# Altium PCB ExchangeDisplay3.PcbDoc (part 3 of 3)
Units mil, origin at the board's own origin, x right, y up, seen from the top; angles counter-clockwise.
Board outline 13550 x 7110 mil, 2 copper layers (Top Layer, Bottom Layer); 256 components, 104 nets, 660 pads, 110 vias.
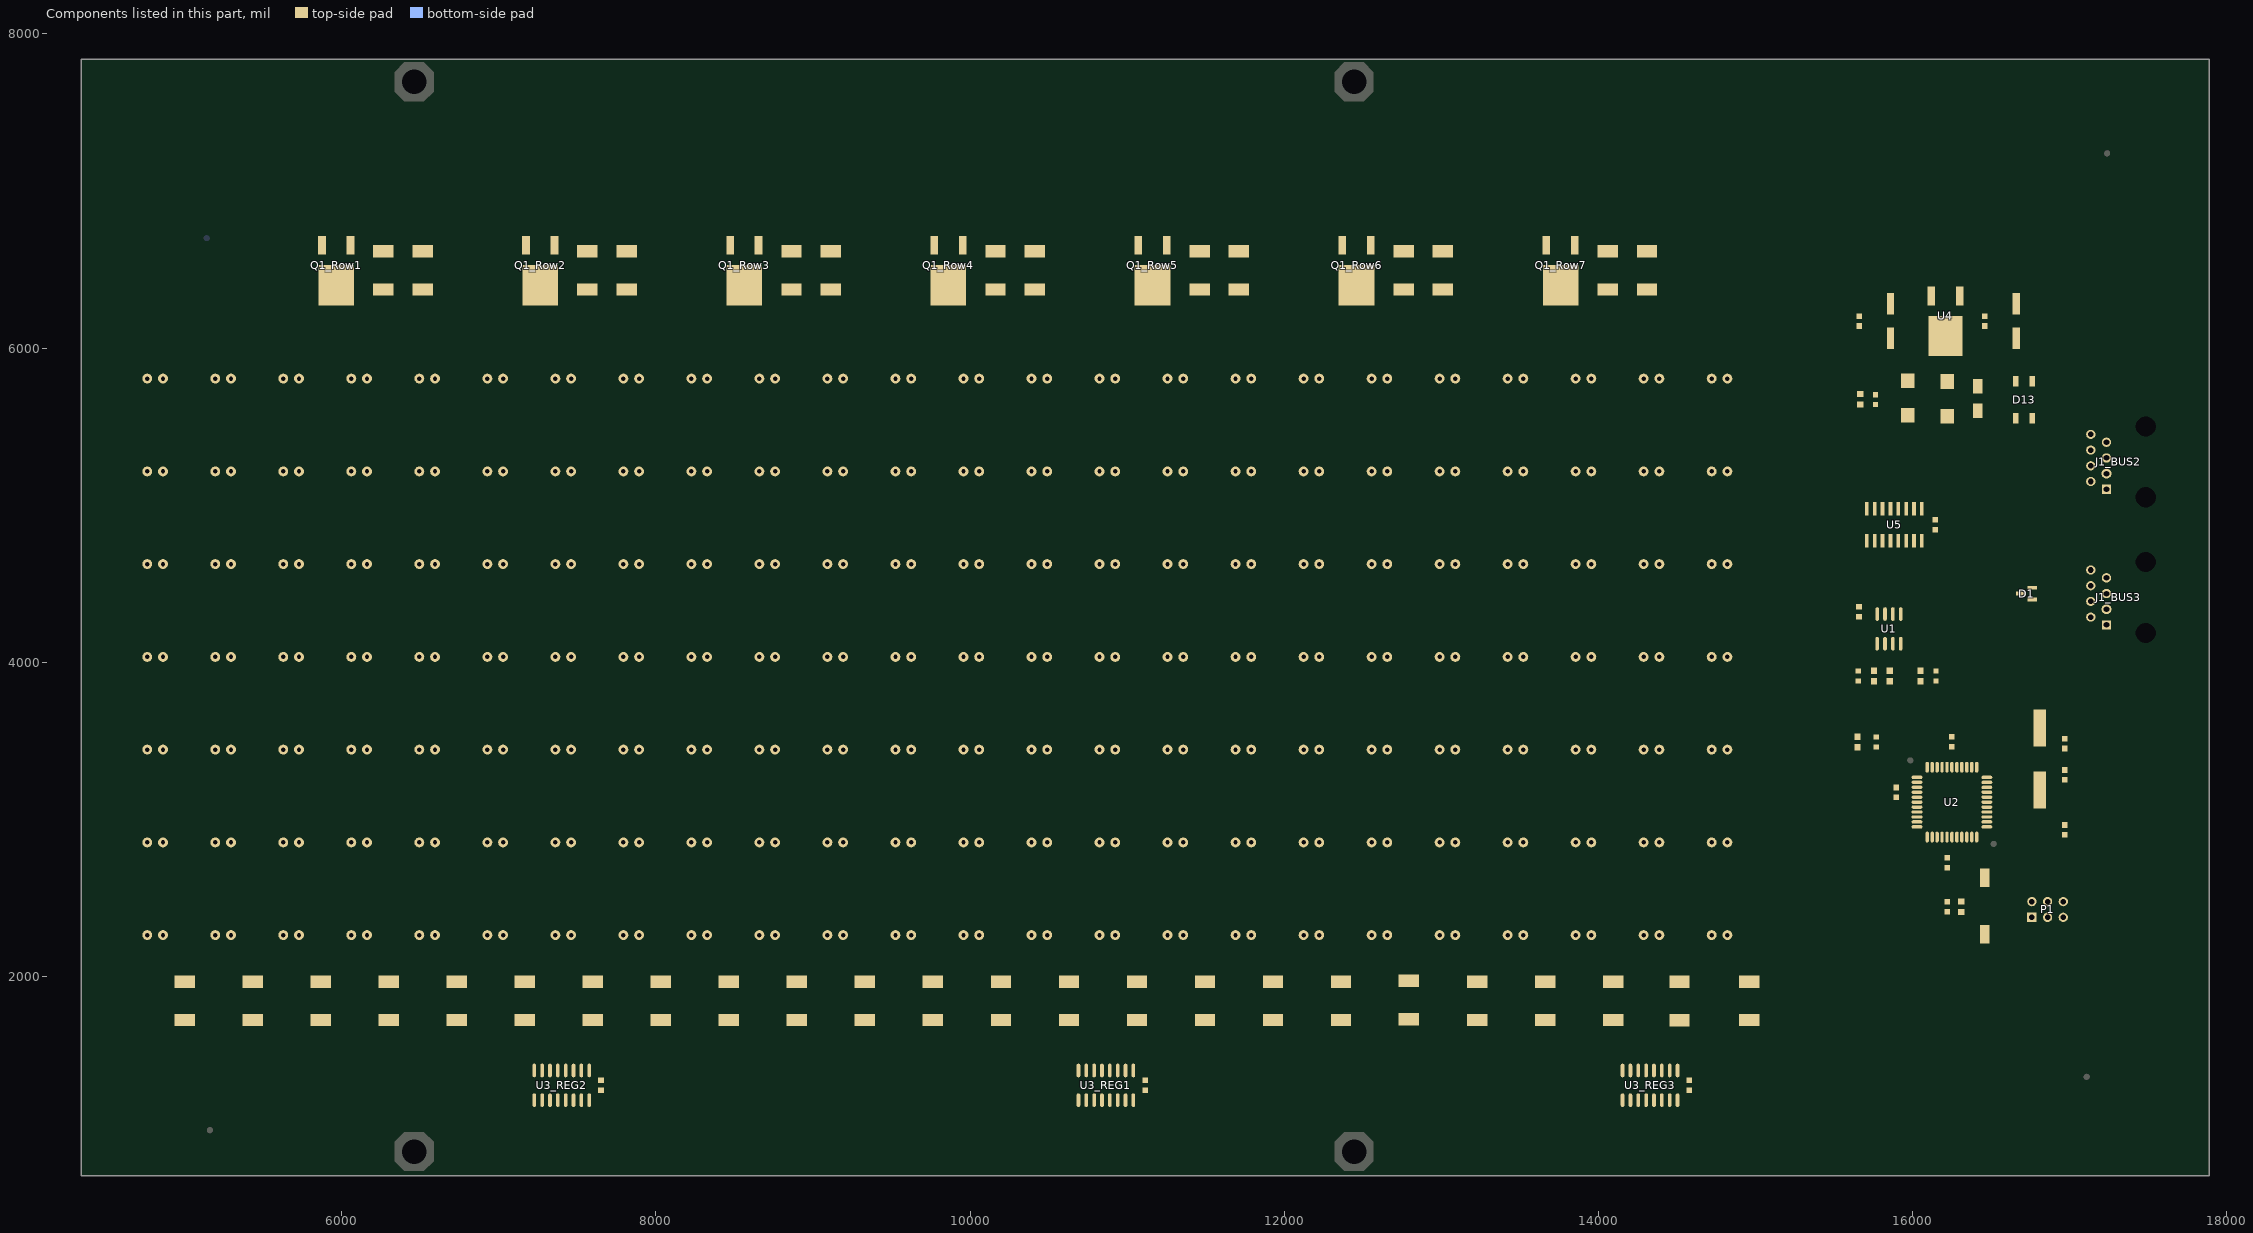
[diagram p3: the components of this part, seen from the top]

## Polygon pours and split planes (outlines as drawn) (continued)
RES22 on Top Layer "Top Layer-No Net" (solid, pour order 1000): 10985.75,5214.27 10985.75,5216.27 11087.75,5318.27 11087.75,5110.27
RES22 on Top Layer "Top Layer-No Net" (solid, pour order 1000): 10985.75,2852.06 10985.75,2854.06 11087.75,2956.06 11087.75,2748.06
RES23 on Top Layer "Top Layer-No Net" (solid, pour order 1000): 10552.68,2261.51 10552.68,2263.51 10654.68,2365.51 10654.68,2157.51
RES23 on Top Layer "Top Layer-No Net" (solid, pour order 1000): 10552.68,3442.61 10552.68,3444.61 10654.68,3546.61 10654.68,3338.61
RES23 on Top Layer "Top Layer-No Net" (solid, pour order 1000): 10552.68,4033.16 10552.68,4035.16 10654.68,4137.16 10654.68,3929.16
RES23 on Top Layer "Top Layer-No Net" (solid, pour order 1000): 10552.68,4623.72 10552.68,4625.72 10654.68,4727.72 10654.68,4519.72
RES23 on Top Layer "Top Layer-No Net" (solid, pour order 1000): 10552.68,5214.27 10552.68,5216.27 10654.68,5318.27 10654.68,5110.27
RES23 on Top Layer "Top Layer-No Net" (solid, pour order 1000): 10552.68,2852.06 10552.68,2854.06 10654.68,2956.06 10654.68,2748.06
RES24 on Top Layer "Top Layer-No Net" (solid, pour order 1000): 10119.61,2261.51 10119.61,2263.51 10221.61,2365.51 10221.61,2157.51
RES24 on Top Layer "Top Layer-No Net" (solid, pour order 1000): 10119.61,3442.61 10119.61,3444.61 10221.61,3546.61 10221.61,3338.61
RES24 on Top Layer "Top Layer-No Net" (solid, pour order 1000): 10119.61,4033.16 10119.61,4035.16 10221.61,4137.16 10221.61,3929.16
RES24 on Top Layer "Top Layer-No Net" (solid, pour order 1000): 10119.61,4623.72 10119.61,4625.72 10221.61,4727.72 10221.61,4519.72
RES24 on Top Layer "Top Layer-No Net" (solid, pour order 1000): 10119.61,5214.27 10119.61,5216.27 10221.61,5318.27 10221.61,5110.27
RES24 on Top Layer "Top Layer-No Net" (solid, pour order 1000): 10119.61,2852.06 10119.61,2854.06 10221.61,2956.06 10221.61,2748.06
RES25 on Top Layer "Top Layer-No Net" (solid, pour order 1000): 9686.54,2261.51 9686.54,2263.51 9788.54,2365.51 9788.54,2157.51
RES25 on Top Layer "Top Layer-No Net" (solid, pour order 1000): 9686.54,3442.61 9686.54,3444.61 9788.54,3546.61 9788.54,3338.61
RES25 on Top Layer "Top Layer-No Net" (solid, pour order 1000): 9686.54,4033.16 9686.54,4035.16 9788.54,4137.16 9788.54,3929.16
RES25 on Top Layer "Top Layer-No Net" (solid, pour order 1000): 9686.54,4623.72 9686.54,4625.72 9788.54,4727.72 9788.54,4519.72
RES25 on Top Layer "Top Layer-No Net" (solid, pour order 1000): 9686.54,5214.27 9686.54,5216.27 9788.54,5318.27 9788.54,5110.27
RES25 on Top Layer "Top Layer-No Net" (solid, pour order 1000): 9686.54,2852.06 9686.54,2854.06 9788.54,2956.06 9788.54,2748.06
RES26 on Top Layer "Top Layer-No Net" (solid, pour order 1000): 9253.47,2261.51 9253.47,2263.51 9355.47,2365.51 9355.47,2157.51
RES26 on Top Layer "Top Layer-No Net" (solid, pour order 1000): 9253.47,3442.61 9253.47,3444.61 9355.47,3546.61 9355.47,3338.61
RES26 on Top Layer "Top Layer-No Net" (solid, pour order 1000): 9253.47,4033.16 9253.47,4035.16 9355.47,4137.16 9355.47,3929.16
RES26 on Top Layer "Top Layer-No Net" (solid, pour order 1000): 9253.47,4623.72 9253.47,4625.72 9355.47,4727.72 9355.47,4519.72
RES26 on Top Layer "Top Layer-No Net" (solid, pour order 1000): 9253.47,5214.27 9253.47,5216.27 9355.47,5318.27 9355.47,5110.27
RES26 on Top Layer "Top Layer-No Net" (solid, pour order 1000): 9253.47,2852.06 9253.47,2854.06 9355.47,2956.06 9355.47,2748.06
RES27 on Top Layer "Top Layer-No Net" (solid, pour order 1000): 8820.4,2261.51 8820.4,2263.51 8922.4,2365.51 8922.4,2157.51
RES27 on Top Layer "Top Layer-No Net" (solid, pour order 1000): 8820.4,3442.61 8820.4,3444.61 8922.4,3546.61 8922.4,3338.61
RES27 on Top Layer "Top Layer-No Net" (solid, pour order 1000): 8820.4,4033.16 8820.4,4035.16 8922.4,4137.16 8922.4,3929.16
RES27 on Top Layer "Top Layer-No Net" (solid, pour order 1000): 8820.4,4623.72 8820.4,4625.72 8922.4,4727.72 8922.4,4519.72
RES27 on Top Layer "Top Layer-No Net" (solid, pour order 1000): 8820.4,5214.27 8820.4,5216.27 8922.4,5318.27 8922.4,5110.27
RES27 on Top Layer "Top Layer-No Net" (solid, pour order 1000): 8820.4,2852.06 8820.4,2854.06 8922.4,2956.06 8922.4,2748.06
RES28 on Top Layer "Top Layer-No Net" (solid, pour order 1000): 8387.33,2261.51 8387.33,2263.51 8489.33,2365.51 8489.33,2157.51
RES28 on Top Layer "Top Layer-No Net" (solid, pour order 1000): 8387.33,3442.61 8387.33,3444.61 8489.33,3546.61 8489.33,3338.61
RES28 on Top Layer "Top Layer-No Net" (solid, pour order 1000): 8387.33,4033.16 8387.33,4035.16 8489.33,4137.16 8489.33,3929.16
RES28 on Top Layer "Top Layer-No Net" (solid, pour order 1000): 8387.33,4623.72 8387.33,4625.72 8489.33,4727.72 8489.33,4519.72
RES28 on Top Layer "Top Layer-No Net" (solid, pour order 1000): 8387.33,5214.27 8387.33,5216.27 8489.33,5318.27 8489.33,5110.27
RES28 on Top Layer "Top Layer-No Net" (solid, pour order 1000): 8387.33,2852.06 8387.33,2854.06 8489.33,2956.06 8489.33,2748.06
RES11 on Top Layer "Top Layer-No Net" (solid, pour order 1000): 7954.26,2261.51 7954.26,2263.51 8056.26,2365.51 8056.26,2157.51
RES11 on Top Layer "Top Layer-No Net" (solid, pour order 1000): 7954.26,3442.61 7954.26,3444.61 8056.26,3546.61 8056.26,3338.61
RES11 on Top Layer "Top Layer-No Net" (solid, pour order 1000): 7954.26,4033.16 7954.26,4035.16 8056.26,4137.16 8056.26,3929.16
RES11 on Top Layer "Top Layer-No Net" (solid, pour order 1000): 7954.26,4623.72 7954.26,4625.72 8056.26,4727.72 8056.26,4519.72
RES11 on Top Layer "Top Layer-No Net" (solid, pour order 1000): 7954.26,5214.27 7954.26,5216.27 8056.26,5318.27 8056.26,5110.27
RES11 on Top Layer "Top Layer-No Net" (solid, pour order 1000): 7954.26,2852.06 7954.26,2854.06 8056.26,2956.06 8056.26,2748.06
RES12 on Top Layer "Top Layer-No Net" (solid, pour order 1000): 7521.18,2261.51 7521.18,2263.51 7623.18,2365.51 7623.18,2157.51
RES12 on Top Layer "Top Layer-No Net" (solid, pour order 1000): 7521.18,3442.61 7521.18,3444.61 7623.18,3546.61 7623.18,3338.61
RES12 on Top Layer "Top Layer-No Net" (solid, pour order 1000): 7521.18,4033.16 7521.18,4035.16 7623.18,4137.16 7623.18,3929.16
RES12 on Top Layer "Top Layer-No Net" (solid, pour order 1000): 7521.18,4623.72 7521.18,4625.72 7623.18,4727.72 7623.18,4519.72
RES12 on Top Layer "Top Layer-No Net" (solid, pour order 1000): 7521.18,5214.27 7521.18,5216.27 7623.18,5318.27 7623.18,5110.27
RES12 on Top Layer "Top Layer-No Net" (solid, pour order 1000): 7521.18,2852.06 7521.18,2854.06 7623.18,2956.06 7623.18,2748.06
RES13 on Top Layer "Top Layer-No Net" (solid, pour order 1000): 7088.11,2261.51 7088.11,2263.51 7190.11,2365.51 7190.11,2157.51
RES13 on Top Layer "Top Layer-No Net" (solid, pour order 1000): 7088.11,3442.61 7088.11,3444.61 7190.11,3546.61 7190.11,3338.61
RES13 on Top Layer "Top Layer-No Net" (solid, pour order 1000): 7088.11,4033.16 7088.11,4035.16 7190.11,4137.16 7190.11,3929.16
RES13 on Top Layer "Top Layer-No Net" (solid, pour order 1000): 7088.11,4623.72 7088.11,4625.72 7190.11,4727.72 7190.11,4519.72
RES13 on Top Layer "Top Layer-No Net" (solid, pour order 1000): 7088.11,5214.27 7088.11,5216.27 7190.11,5318.27 7190.11,5110.27
RES13 on Top Layer "Top Layer-No Net" (solid, pour order 1000): 7088.11,2852.06 7088.11,2854.06 7190.11,2956.06 7190.11,2748.06
RES14 on Top Layer "Top Layer-No Net" (solid, pour order 1000): 6655.04,2261.51 6655.04,2263.51 6757.04,2365.51 6757.04,2157.51
RES14 on Top Layer "Top Layer-No Net" (solid, pour order 1000): 6655.04,3442.61 6655.04,3444.61 6757.04,3546.61 6757.04,3338.61
RES14 on Top Layer "Top Layer-No Net" (solid, pour order 1000): 6655.04,4033.16 6655.04,4035.16 6757.04,4137.16 6757.04,3929.16
RES14 on Top Layer "Top Layer-No Net" (solid, pour order 1000): 6655.04,4623.72 6655.04,4625.72 6757.04,4727.72 6757.04,4519.72
RES14 on Top Layer "Top Layer-No Net" (solid, pour order 1000): 6655.04,5214.27 6655.04,5216.27 6757.04,5318.27 6757.04,5110.27
RES14 on Top Layer "Top Layer-No Net" (solid, pour order 1000): 6655.04,2852.06 6655.04,2854.06 6757.04,2956.06 6757.04,2748.06
RES15 on Top Layer "Top Layer-No Net" (solid, pour order 1000): 6221.97,2261.51 6221.97,2263.51 6323.97,2365.51 6323.97,2157.51
RES15 on Top Layer "Top Layer-No Net" (solid, pour order 1000): 6221.97,3442.61 6221.97,3444.61 6323.97,3546.61 6323.97,3338.61
RES15 on Top Layer "Top Layer-No Net" (solid, pour order 1000): 6221.97,4033.16 6221.97,4035.16 6323.97,4137.16 6323.97,3929.16
RES15 on Top Layer "Top Layer-No Net" (solid, pour order 1000): 6221.97,4623.72 6221.97,4625.72 6323.97,4727.72 6323.97,4519.72
RES15 on Top Layer "Top Layer-No Net" (solid, pour order 1000): 6221.97,5214.27 6221.97,5216.27 6323.97,5318.27 6323.97,5110.27
RES15 on Top Layer "Top Layer-No Net" (solid, pour order 1000): 6221.97,2852.06 6221.97,2854.06 6323.97,2956.06 6323.97,2748.06
RES16 on Top Layer "Top Layer-No Net" (solid, pour order 1000): 5788.9,2261.51 5788.9,2263.51 5890.9,2365.51 5890.9,2157.51
RES16 on Top Layer "Top Layer-No Net" (solid, pour order 1000): 5788.9,3442.61 5788.9,3444.61 5890.9,3546.61 5890.9,3338.61
RES16 on Top Layer "Top Layer-No Net" (solid, pour order 1000): 5788.9,4033.16 5788.9,4035.16 5890.9,4137.16 5890.9,3929.16
RES16 on Top Layer "Top Layer-No Net" (solid, pour order 1000): 5788.9,4623.72 5788.9,4625.72 5890.9,4727.72 5890.9,4519.72
RES16 on Top Layer "Top Layer-No Net" (solid, pour order 1000): 5788.9,5214.27 5788.9,5216.27 5890.9,5318.27 5890.9,5110.27
RES16 on Top Layer "Top Layer-No Net" (solid, pour order 1000): 5788.9,2852.06 5788.9,2854.06 5890.9,2956.06 5890.9,2748.06
RES17 on Top Layer "Top Layer-No Net" (solid, pour order 1000): 5355.83,2261.51 5355.83,2263.51 5457.83,2365.51 5457.83,2157.51
RES17 on Top Layer "Top Layer-No Net" (solid, pour order 1000): 5355.83,3442.61 5355.83,3444.61 5457.83,3546.61 5457.83,3338.61
RES17 on Top Layer "Top Layer-No Net" (solid, pour order 1000): 5355.83,4033.16 5355.83,4035.16 5457.83,4137.16 5457.83,3929.16
RES17 on Top Layer "Top Layer-No Net" (solid, pour order 1000): 5355.83,4623.72 5355.83,4625.72 5457.83,4727.72 5457.83,4519.72
RES17 on Top Layer "Top Layer-No Net" (solid, pour order 1000): 5355.83,5214.27 5355.83,5216.27 5457.83,5318.27 5457.83,5110.27
RES17 on Top Layer "Top Layer-No Net" (solid, pour order 1000): 5355.83,2852.06 5355.83,2854.06 5457.83,2956.06 5457.83,2748.06
RES18 on Top Layer "Top Layer-No Net" (solid, pour order 1000): 4922.76,2261.51 4922.76,2263.51 5024.76,2365.51 5024.76,2157.51
RES18 on Top Layer "Top Layer-No Net" (solid, pour order 1000): 4922.76,3442.61 4922.76,3444.61 5024.76,3546.61 5024.76,3338.61
RES18 on Top Layer "Top Layer-No Net" (solid, pour order 1000): 4922.76,4033.16 4922.76,4035.16 5024.76,4137.16 5024.76,3929.16
RES18 on Top Layer "Top Layer-No Net" (solid, pour order 1000): 4922.76,4623.72 4922.76,4625.72 5024.76,4727.72 5024.76,4519.72
RES18 on Top Layer "Top Layer-No Net" (solid, pour order 1000): 4922.76,5214.27 4922.76,5216.27 5024.76,5318.27 5024.76,5110.27
RES18 on Top Layer "Top Layer-No Net" (solid, pour order 1000): 4922.76,2852.06 4922.76,2854.06 5024.76,2956.06 5024.76,2748.06
VCC on Top Layer "Top Layer-No Net" (solid, pour order 1000): 11690.84,2031 11688.84,2031 11586.84,2133 11794.84,2133
VCC on Top Layer "Top Layer-No Net" (solid, pour order 1007): 11764.43,2080 11789.43,2105 11789.43,2155 11764.43,2180 11614.43,2180 11589.43,2155 11589.43,2105 11614.43,2080
VCC on Top Layer "Top Layer-No Net" (solid, pour order 1000): 8226.27,2031 8224.27,2031 8122.27,2133 8330.27,2133
VCC on Top Layer "Top Layer-No Net" (solid, pour order 1007): 8299.87,2080 8324.87,2105 8324.87,2155 8299.87,2180 8149.87,2180 8124.87,2155 8124.87,2105 8149.87,2080
EXTSUPP_Row1 on Top Layer "Top Layer-No Net" (solid, pour order 1000): 13012.06,6808.12 13010.06,6808.12 12908.06,6910.12 13116.06,6910.12
EXTSUPP_Row1 on Top Layer "Top Layer-No Net" (solid, pour order 1000): 12371.06,6807.12 12369.06,6807.12 12267.06,6909.12 12475.06,6909.12
EXTSUPP_Row1 on Top Layer "Top Layer-No Net" (solid, pour order 1000): 11712.84,6808.12 11710.84,6808.12 11608.84,6910.12 11816.84,6910.12
EXTSUPP_Row1 on Top Layer "Top Layer-No Net" (solid, pour order 1000): 11071.84,6807.12 11069.84,6807.12 10967.84,6909.12 11175.84,6909.12
EXTSUPP_Row1 on Top Layer "Top Layer-No Net" (solid, pour order 1000): 10413.63,6808.12 10411.63,6808.12 10309.63,6910.12 10517.63,6910.12
EXTSUPP_Row1 on Top Layer "Top Layer-No Net" (solid, pour order 1000): 9772.63,6807.12 9770.63,6807.12 9668.63,6909.12 9876.63,6909.12
EXTSUPP_Row1 on Top Layer "Top Layer-No Net" (solid, pour order 1000): 9114.42,6808.12 9112.42,6808.12 9010.42,6910.12 9218.42,6910.12
EXTSUPP_Row1 on Top Layer "Top Layer-No Net" (solid, pour order 1000): 8473.42,6807.12 8471.42,6807.12 8369.42,6909.12 8577.42,6909.12
EXTSUPP_Row1 on Top Layer "Top Layer-No Net" (solid, pour order 1000): 7815.21,6808.12 7813.21,6808.12 7711.21,6910.12 7919.21,6910.12
EXTSUPP_Row1 on Top Layer "Top Layer-No Net" (solid, pour order 1000): 7174.21,6807.12 7172.21,6807.12 7070.21,6909.12 7278.21,6909.12
EXTSUPP_Row1 on Top Layer "Top Layer-No Net" (solid, pour order 1000): 6515.99,6808.12 6513.99,6808.12 6411.99,6910.12 6619.99,6910.12
OUT_Row6 on Top Layer "Top Layer-No Net" (solid, pour order 1000): 12555.79,5517.17 12557.79,5517.17 12659.79,5415.17 12451.79,5415.17
OUT_Row6 on Top Layer "Top Layer-No Net" (solid, pour order 1000): 12480.89,5462.17 12455.89,5437.17 12455.89,5387.17 12480.89,5362.17 12630.89,5362.17 12655.89,5387.17 12655.89,5437.17 12630.89,5462.17
OUT_Row5 on Top Layer "Top Layer-No Net" (solid, pour order 1000): 11256.57,4926.62 11258.57,4926.62 11360.57,4824.62 11152.57,4824.62
OUT_Row5 on Top Layer "Top Layer-No Net" (solid, pour order 1000): 11181.68,4871.62 11156.68,4846.62 11156.68,4796.62 11181.68,4771.62 11331.68,4771.62 11356.68,4796.62 11356.68,4846.62 11331.68,4871.62
OUT_Row4 on Top Layer "Top Layer-No Net" (solid, pour order 1000): 9957.36,4336.07 9959.36,4336.07 10061.36,4234.07 9853.36,4234.07
OUT_Row4 on Top Layer "Top Layer-No Net" (solid, pour order 1000): 9882.46,4281.07 9857.46,4256.07 9857.46,4206.07 9882.46,4181.07 10032.46,4181.07 10057.46,4206.07 10057.46,4256.07 10032.46,4281.07
OUT_Row3 on Top Layer "Top Layer-No Net" (solid, pour order 1000): 8658.15,3745.52 8660.15,3745.52 8762.15,3643.52 8554.15,3643.52
OUT_Row3 on Top Layer "Top Layer-No Net" (solid, pour order 1000): 8583.25,3690.52 8558.25,3665.52 8558.25,3615.52 8583.25,3590.52 8733.25,3590.52 8758.25,3615.52 8758.25,3665.52 8733.25,3690.52
OUT_Row2 on Top Layer "Top Layer-No Net" (solid, pour order 1000): 7358.94,3154.97 7360.94,3154.97 7462.94,3052.97 7254.94,3052.97
OUT_Row2 on Top Layer "Top Layer-No Net" (solid, pour order 1000): 7284.04,3099.97 7259.04,3074.97 7259.04,3024.97 7284.04,2999.97 7434.04,2999.97 7459.04,3024.97 7459.04,3074.97 7434.04,3099.97
OUT_Row1 on Top Layer "Top Layer-No Net" (solid, pour order 1000): 6059.72,2564.42 6061.72,2564.42 6163.72,2462.42 5955.72,2462.42
OUT_Row1 on Top Layer "Top Layer-No Net" (solid, pour order 1000): 5984.83,2509.42 5959.83,2484.42 5959.83,2434.42 5984.83,2409.42 6134.83,2409.42 6159.83,2434.42 6159.83,2484.42 6134.83,2509.42
GND on Top Layer "Top Layer-No Net" (solid, pour order 1000): 17890,7840 17890,730 4340,730 4340,1850 14910,1850 15310,2250 15310,7840
VCC on Bottom Layer "Top Layer-No Net" (solid, pour order 1018): 15229,2081 15254,2106 15254,2156 15229,2181 15079,2181 15054,2156 15054,2106 15079,2081
OUT_Row1 on Bottom Layer "Top Layer-No Net" (solid, pour order 1000): 14289.62,2381.82 14287.62,2381.82 14185.62,2483.82 14393.62,2483.82
OUT_Row1 on Bottom Layer "Top Layer-No Net" (solid, pour order 1000): 13856.55,2381.82 13854.55,2381.82 13752.55,2483.82 13960.55,2483.82
OUT_Row1 on Bottom Layer "Top Layer-No Net" (solid, pour order 1000): 13423.48,2381.82 13421.48,2381.82 13319.48,2483.82 13527.48,2483.82
OUT_Row1 on Bottom Layer "Top Layer-No Net" (solid, pour order 1000): 12990.41,2381.82 12988.41,2381.82 12886.41,2483.82 13094.41,2483.82
OUT_Row1 on Bottom Layer "Top Layer-No Net" (solid, pour order 1000): 12557.34,2381.82 12555.34,2381.82 12453.34,2483.82 12661.34,2483.82
OUT_Row1 on Bottom Layer "Top Layer-No Net" (solid, pour order 1000): 12124.27,2381.82 12122.27,2381.82 12020.27,2483.82 12228.27,2483.82
OUT_Row1 on Bottom Layer "Top Layer-No Net" (solid, pour order 1000): 11691.2,2381.82 11689.2,2381.82 11587.2,2483.82 11795.2,2483.82
OUT_Row1 on Bottom Layer "Top Layer-No Net" (solid, pour order 1000): 11258.13,2381.82 11256.13,2381.82 11154.13,2483.82 11362.13,2483.82
OUT_Row1 on Bottom Layer "Top Layer-No Net" (solid, pour order 1000): 10825.06,2381.82 10823.06,2381.82 10721.06,2483.82 10929.06,2483.82
OUT_Row1 on Bottom Layer "Top Layer-No Net" (solid, pour order 1000): 10391.99,2381.82 10389.99,2381.82 10287.99,2483.82 10495.99,2483.82
OUT_Row1 on Bottom Layer "Top Layer-No Net" (solid, pour order 1000): 9958.92,2381.82 9956.92,2381.82 9854.92,2483.82 10062.92,2483.82
OUT_Row1 on Bottom Layer "Top Layer-No Net" (solid, pour order 1000): 9525.84,2381.82 9523.84,2381.82 9421.84,2483.82 9629.84,2483.82
OUT_Row1 on Bottom Layer "Top Layer-No Net" (solid, pour order 1000): 9092.77,2381.82 9090.77,2381.82 8988.77,2483.82 9196.77,2483.82
OUT_Row1 on Bottom Layer "Top Layer-No Net" (solid, pour order 1000): 8659.7,2381.82 8657.7,2381.82 8555.7,2483.82 8763.7,2483.82
OUT_Row1 on Bottom Layer "Top Layer-No Net" (solid, pour order 1000): 8226.63,2381.82 8224.63,2381.82 8122.63,2483.82 8330.63,2483.82
OUT_Row1 on Bottom Layer "Top Layer-No Net" (solid, pour order 1000): 7793.56,2381.82 7791.56,2381.82 7689.56,2483.82 7897.56,2483.82
OUT_Row1 on Bottom Layer "Top Layer-No Net" (solid, pour order 1000): 7360.49,2381.82 7358.49,2381.82 7256.49,2483.82 7464.49,2483.82
OUT_Row1 on Bottom Layer "Top Layer-No Net" (solid, pour order 1000): 6927.42,2381.82 6925.42,2381.82 6823.42,2483.82 7031.42,2483.82
OUT_Row1 on Bottom Layer "Top Layer-No Net" (solid, pour order 1000): 6494.35,2381.82 6492.35,2381.82 6390.35,2483.82 6598.35,2483.82
OUT_Row1 on Bottom Layer "Top Layer-No Net" (solid, pour order 1000): 6061.28,2381.82 6059.28,2381.82 5957.28,2483.82 6165.28,2483.82
OUT_Row1 on Bottom Layer "Top Layer-No Net" (solid, pour order 1000): 5628.21,2381.82 5626.21,2381.82 5524.21,2483.82 5732.21,2483.82
OUT_Row1 on Bottom Layer "Top Layer-No Net" (solid, pour order 1000): 5195.14,2381.82 5193.14,2381.82 5091.14,2483.82 5299.14,2483.82
OUT_Row2 on Bottom Layer "Top Layer-No Net" (solid, pour order 1000): 5195.14,2972.37 5193.14,2972.37 5091.14,3074.37 5299.14,3074.37
OUT_Row2 on Bottom Layer "Top Layer-No Net" (solid, pour order 1000): 5628.21,2972.37 5626.21,2972.37 5524.21,3074.37 5732.21,3074.37
OUT_Row2 on Bottom Layer "Top Layer-No Net" (solid, pour order 1000): 6061.28,2972.37 6059.28,2972.37 5957.28,3074.37 6165.28,3074.37
OUT_Row2 on Bottom Layer "Top Layer-No Net" (solid, pour order 1000): 6494.35,2972.37 6492.35,2972.37 6390.35,3074.37 6598.35,3074.37
OUT_Row2 on Bottom Layer "Top Layer-No Net" (solid, pour order 1000): 6927.42,2972.37 6925.42,2972.37 6823.42,3074.37 7031.42,3074.37
OUT_Row2 on Bottom Layer "Top Layer-No Net" (solid, pour order 1000): 7360.49,2972.37 7358.49,2972.37 7256.49,3074.37 7464.49,3074.37
OUT_Row2 on Bottom Layer "Top Layer-No Net" (solid, pour order 1000): 7793.56,2972.37 7791.56,2972.37 7689.56,3074.37 7897.56,3074.37
OUT_Row2 on Bottom Layer "Top Layer-No Net" (solid, pour order 1000): 8226.63,2972.37 8224.63,2972.37 8122.63,3074.37 8330.63,3074.37
OUT_Row2 on Bottom Layer "Top Layer-No Net" (solid, pour order 1000): 8659.7,2972.37 8657.7,2972.37 8555.7,3074.37 8763.7,3074.37
OUT_Row2 on Bottom Layer "Top Layer-No Net" (solid, pour order 1000): 9092.77,2972.37 9090.77,2972.37 8988.77,3074.37 9196.77,3074.37
OUT_Row2 on Bottom Layer "Top Layer-No Net" (solid, pour order 1000): 9525.84,2972.37 9523.84,2972.37 9421.84,3074.37 9629.84,3074.37
OUT_Row2 on Bottom Layer "Top Layer-No Net" (solid, pour order 1000): 9958.92,2972.37 9956.92,2972.37 9854.92,3074.37 10062.92,3074.37
OUT_Row2 on Bottom Layer "Top Layer-No Net" (solid, pour order 1000): 10391.99,2972.37 10389.99,2972.37 10287.99,3074.37 10495.99,3074.37
OUT_Row2 on Bottom Layer "Top Layer-No Net" (solid, pour order 1000): 10825.06,2972.37 10823.06,2972.37 10721.06,3074.37 10929.06,3074.37
OUT_Row2 on Bottom Layer "Top Layer-No Net" (solid, pour order 1000): 11258.13,2972.37 11256.13,2972.37 11154.13,3074.37 11362.13,3074.37
OUT_Row2 on Bottom Layer "Top Layer-No Net" (solid, pour order 1000): 11691.2,2972.37 11689.2,2972.37 11587.2,3074.37 11795.2,3074.37
OUT_Row2 on Bottom Layer "Top Layer-No Net" (solid, pour order 1000): 12124.27,2972.37 12122.27,2972.37 12020.27,3074.37 12228.27,3074.37
OUT_Row2 on Bottom Layer "Top Layer-No Net" (solid, pour order 1000): 12557.34,2972.37 12555.34,2972.37 12453.34,3074.37 12661.34,3074.37
OUT_Row2 on Bottom Layer "Top Layer-No Net" (solid, pour order 1000): 12990.41,2972.37 12988.41,2972.37 12886.41,3074.37 13094.41,3074.37
OUT_Row2 on Bottom Layer "Top Layer-No Net" (solid, pour order 1000): 13423.48,2972.37 13421.48,2972.37 13319.48,3074.37 13527.48,3074.37
OUT_Row2 on Bottom Layer "Top Layer-No Net" (solid, pour order 1000): 13856.55,2972.37 13854.55,2972.37 13752.55,3074.37 13960.55,3074.37
OUT_Row2 on Bottom Layer "Top Layer-No Net" (solid, pour order 1000): 14289.62,2972.37 14287.62,2972.37 14185.62,3074.37 14393.62,3074.37
OUT_Row3 on Bottom Layer "Top Layer-No Net" (solid, pour order 1000): 5195.14,3562.92 5193.14,3562.92 5091.14,3664.92 5299.14,3664.92
OUT_Row3 on Bottom Layer "Top Layer-No Net" (solid, pour order 1000): 5628.21,3562.92 5626.21,3562.92 5524.21,3664.92 5732.21,3664.92
OUT_Row3 on Bottom Layer "Top Layer-No Net" (solid, pour order 1000): 6061.28,3562.92 6059.28,3562.92 5957.28,3664.92 6165.28,3664.92
OUT_Row3 on Bottom Layer "Top Layer-No Net" (solid, pour order 1000): 6494.35,3562.92 6492.35,3562.92 6390.35,3664.92 6598.35,3664.92
OUT_Row3 on Bottom Layer "Top Layer-No Net" (solid, pour order 1000): 6927.42,3562.92 6925.42,3562.92 6823.42,3664.92 7031.42,3664.92
OUT_Row3 on Bottom Layer "Top Layer-No Net" (solid, pour order 1000): 7360.49,3562.92 7358.49,3562.92 7256.49,3664.92 7464.49,3664.92
OUT_Row3 on Bottom Layer "Top Layer-No Net" (solid, pour order 1000): 7793.56,3562.92 7791.56,3562.92 7689.56,3664.92 7897.56,3664.92
OUT_Row3 on Bottom Layer "Top Layer-No Net" (solid, pour order 1000): 8226.63,3562.92 8224.63,3562.92 8122.63,3664.92 8330.63,3664.92
OUT_Row3 on Bottom Layer "Top Layer-No Net" (solid, pour order 1000): 8659.7,3562.92 8657.7,3562.92 8555.7,3664.92 8763.7,3664.92
OUT_Row3 on Bottom Layer "Top Layer-No Net" (solid, pour order 1000): 9092.77,3562.92 9090.77,3562.92 8988.77,3664.92 9196.77,3664.92
OUT_Row3 on Bottom Layer "Top Layer-No Net" (solid, pour order 1000): 9525.84,3562.92 9523.84,3562.92 9421.84,3664.92 9629.84,3664.92
OUT_Row3 on Bottom Layer "Top Layer-No Net" (solid, pour order 1000): 9958.92,3562.92 9956.92,3562.92 9854.92,3664.92 10062.92,3664.92
OUT_Row3 on Bottom Layer "Top Layer-No Net" (solid, pour order 1000): 10391.99,3562.92 10389.99,3562.92 10287.99,3664.92 10495.99,3664.92
OUT_Row3 on Bottom Layer "Top Layer-No Net" (solid, pour order 1000): 10825.06,3562.92 10823.06,3562.92 10721.06,3664.92 10929.06,3664.92
OUT_Row3 on Bottom Layer "Top Layer-No Net" (solid, pour order 1000): 11258.13,3562.92 11256.13,3562.92 11154.13,3664.92 11362.13,3664.92
OUT_Row3 on Bottom Layer "Top Layer-No Net" (solid, pour order 1000): 11691.2,3562.92 11689.2,3562.92 11587.2,3664.92 11795.2,3664.92
OUT_Row3 on Bottom Layer "Top Layer-No Net" (solid, pour order 1000): 12124.27,3562.92 12122.27,3562.92 12020.27,3664.92 12228.27,3664.92
OUT_Row3 on Bottom Layer "Top Layer-No Net" (solid, pour order 1000): 12557.34,3562.92 12555.34,3562.92 12453.34,3664.92 12661.34,3664.92
OUT_Row3 on Bottom Layer "Top Layer-No Net" (solid, pour order 1000): 12990.41,3562.92 12988.41,3562.92 12886.41,3664.92 13094.41,3664.92
OUT_Row3 on Bottom Layer "Top Layer-No Net" (solid, pour order 1000): 13423.48,3562.92 13421.48,3562.92 13319.48,3664.92 13527.48,3664.92
OUT_Row3 on Bottom Layer "Top Layer-No Net" (solid, pour order 1000): 13856.55,3562.92 13854.55,3562.92 13752.55,3664.92 13960.55,3664.92
OUT_Row3 on Bottom Layer "Top Layer-No Net" (solid, pour order 1000): 14289.62,3562.92 14287.62,3562.92 14185.62,3664.92 14393.62,3664.92
OUT_Row4 on Bottom Layer "Top Layer-No Net" (solid, pour order 1000): 5195.14,4153.47 5193.14,4153.47 5091.14,4255.47 5299.14,4255.47
OUT_Row4 on Bottom Layer "Top Layer-No Net" (solid, pour order 1000): 5628.21,4153.47 5626.21,4153.47 5524.21,4255.47 5732.21,4255.47
OUT_Row4 on Bottom Layer "Top Layer-No Net" (solid, pour order 1000): 6061.28,4153.47 6059.28,4153.47 5957.28,4255.47 6165.28,4255.47
OUT_Row4 on Bottom Layer "Top Layer-No Net" (solid, pour order 1000): 6494.35,4153.47 6492.35,4153.47 6390.35,4255.47 6598.35,4255.47
OUT_Row4 on Bottom Layer "Top Layer-No Net" (solid, pour order 1000): 6927.42,4153.47 6925.42,4153.47 6823.42,4255.47 7031.42,4255.47
OUT_Row4 on Bottom Layer "Top Layer-No Net" (solid, pour order 1000): 7360.49,4153.47 7358.49,4153.47 7256.49,4255.47 7464.49,4255.47
OUT_Row4 on Bottom Layer "Top Layer-No Net" (solid, pour order 1000): 7793.56,4153.47 7791.56,4153.47 7689.56,4255.47 7897.56,4255.47
OUT_Row4 on Bottom Layer "Top Layer-No Net" (solid, pour order 1000): 8226.63,4153.47 8224.63,4153.47 8122.63,4255.47 8330.63,4255.47
OUT_Row4 on Bottom Layer "Top Layer-No Net" (solid, pour order 1000): 8659.7,4153.47 8657.7,4153.47 8555.7,4255.47 8763.7,4255.47
OUT_Row4 on Bottom Layer "Top Layer-No Net" (solid, pour order 1000): 9092.77,4153.47 9090.77,4153.47 8988.77,4255.47 9196.77,4255.47
OUT_Row4 on Bottom Layer "Top Layer-No Net" (solid, pour order 1000): 9525.84,4153.47 9523.84,4153.47 9421.84,4255.47 9629.84,4255.47
OUT_Row4 on Bottom Layer "Top Layer-No Net" (solid, pour order 1000): 9958.92,4153.47 9956.92,4153.47 9854.92,4255.47 10062.92,4255.47
OUT_Row4 on Bottom Layer "Top Layer-No Net" (solid, pour order 1000): 10391.99,4153.47 10389.99,4153.47 10287.99,4255.47 10495.99,4255.47
OUT_Row4 on Bottom Layer "Top Layer-No Net" (solid, pour order 1000): 10825.06,4153.47 10823.06,4153.47 10721.06,4255.47 10929.06,4255.47
OUT_Row4 on Bottom Layer "Top Layer-No Net" (solid, pour order 1000): 11258.13,4153.47 11256.13,4153.47 11154.13,4255.47 11362.13,4255.47
OUT_Row4 on Bottom Layer "Top Layer-No Net" (solid, pour order 1000): 11691.2,4153.47 11689.2,4153.47 11587.2,4255.47 11795.2,4255.47
OUT_Row4 on Bottom Layer "Top Layer-No Net" (solid, pour order 1000): 12124.27,4153.47 12122.27,4153.47 12020.27,4255.47 12228.27,4255.47
OUT_Row4 on Bottom Layer "Top Layer-No Net" (solid, pour order 1000): 12557.34,4153.47 12555.34,4153.47 12453.34,4255.47 12661.34,4255.47
OUT_Row4 on Bottom Layer "Top Layer-No Net" (solid, pour order 1000): 12990.41,4153.47 12988.41,4153.47 12886.41,4255.47 13094.41,4255.47
OUT_Row4 on Bottom Layer "Top Layer-No Net" (solid, pour order 1000): 13423.48,4153.47 13421.48,4153.47 13319.48,4255.47 13527.48,4255.47
OUT_Row4 on Bottom Layer "Top Layer-No Net" (solid, pour order 1000): 13856.55,4153.47 13854.55,4153.47 13752.55,4255.47 13960.55,4255.47
OUT_Row4 on Bottom Layer "Top Layer-No Net" (solid, pour order 1000): 14289.62,4153.47 14287.62,4153.47 14185.62,4255.47 14393.62,4255.47
OUT_Row5 on Bottom Layer "Top Layer-No Net" (solid, pour order 1000): 5195.14,4744.02 5193.14,4744.02 5091.14,4846.02 5299.14,4846.02
OUT_Row5 on Bottom Layer "Top Layer-No Net" (solid, pour order 1000): 5628.21,4744.02 5626.21,4744.02 5524.21,4846.02 5732.21,4846.02
OUT_Row5 on Bottom Layer "Top Layer-No Net" (solid, pour order 1000): 6061.28,4744.02 6059.28,4744.02 5957.28,4846.02 6165.28,4846.02
OUT_Row5 on Bottom Layer "Top Layer-No Net" (solid, pour order 1000): 6494.35,4744.02 6492.35,4744.02 6390.35,4846.02 6598.35,4846.02
OUT_Row5 on Bottom Layer "Top Layer-No Net" (solid, pour order 1000): 6927.42,4744.02 6925.42,4744.02 6823.42,4846.02 7031.42,4846.02
OUT_Row5 on Bottom Layer "Top Layer-No Net" (solid, pour order 1000): 7360.49,4744.02 7358.49,4744.02 7256.49,4846.02 7464.49,4846.02
OUT_Row5 on Bottom Layer "Top Layer-No Net" (solid, pour order 1000): 7793.56,4744.02 7791.56,4744.02 7689.56,4846.02 7897.56,4846.02
OUT_Row5 on Bottom Layer "Top Layer-No Net" (solid, pour order 1000): 8226.63,4744.02 8224.63,4744.02 8122.63,4846.02 8330.63,4846.02
OUT_Row5 on Bottom Layer "Top Layer-No Net" (solid, pour order 1000): 8659.7,4744.02 8657.7,4744.02 8555.7,4846.02 8763.7,4846.02
OUT_Row5 on Bottom Layer "Top Layer-No Net" (solid, pour order 1000): 9092.77,4744.02 9090.77,4744.02 8988.77,4846.02 9196.77,4846.02
OUT_Row5 on Bottom Layer "Top Layer-No Net" (solid, pour order 1000): 9525.84,4744.02 9523.84,4744.02 9421.84,4846.02 9629.84,4846.02
OUT_Row5 on Bottom Layer "Top Layer-No Net" (solid, pour order 1000): 9958.92,4744.02 9956.92,4744.02 9854.92,4846.02 10062.92,4846.02
OUT_Row5 on Bottom Layer "Top Layer-No Net" (solid, pour order 1000): 10391.99,4744.02 10389.99,4744.02 10287.99,4846.02 10495.99,4846.02
OUT_Row5 on Bottom Layer "Top Layer-No Net" (solid, pour order 1000): 10825.06,4744.02 10823.06,4744.02 10721.06,4846.02 10929.06,4846.02
OUT_Row5 on Bottom Layer "Top Layer-No Net" (solid, pour order 1000): 11258.13,4744.02 11256.13,4744.02 11154.13,4846.02 11362.13,4846.02
OUT_Row5 on Bottom Layer "Top Layer-No Net" (solid, pour order 1000): 11691.2,4744.02 11689.2,4744.02 11587.2,4846.02 11795.2,4846.02
OUT_Row5 on Bottom Layer "Top Layer-No Net" (solid, pour order 1000): 12124.27,4744.02 12122.27,4744.02 12020.27,4846.02 12228.27,4846.02
OUT_Row5 on Bottom Layer "Top Layer-No Net" (solid, pour order 1000): 12557.34,4744.02 12555.34,4744.02 12453.34,4846.02 12661.34,4846.02
OUT_Row5 on Bottom Layer "Top Layer-No Net" (solid, pour order 1000): 12990.41,4744.02 12988.41,4744.02 12886.41,4846.02 13094.41,4846.02
OUT_Row5 on Bottom Layer "Top Layer-No Net" (solid, pour order 1000): 13423.48,4744.02 13421.48,4744.02 13319.48,4846.02 13527.48,4846.02
OUT_Row5 on Bottom Layer "Top Layer-No Net" (solid, pour order 1000): 13856.55,4744.02 13854.55,4744.02 13752.55,4846.02 13960.55,4846.02
OUT_Row5 on Bottom Layer "Top Layer-No Net" (solid, pour order 1000): 14289.62,4744.02 14287.62,4744.02 14185.62,4846.02 14393.62,4846.02
OUT_Row6 on Bottom Layer "Top Layer-No Net" (solid, pour order 1000): 5195.14,5334.57 5193.14,5334.57 5091.14,5436.57 5299.14,5436.57
OUT_Row6 on Bottom Layer "Top Layer-No Net" (solid, pour order 1000): 5628.21,5334.57 5626.21,5334.57 5524.21,5436.57 5732.21,5436.57
OUT_Row6 on Bottom Layer "Top Layer-No Net" (solid, pour order 1000): 6061.28,5334.57 6059.28,5334.57 5957.28,5436.57 6165.28,5436.57
OUT_Row6 on Bottom Layer "Top Layer-No Net" (solid, pour order 1000): 6494.35,5334.57 6492.35,5334.57 6390.35,5436.57 6598.35,5436.57
OUT_Row6 on Bottom Layer "Top Layer-No Net" (solid, pour order 1000): 6927.42,5334.57 6925.42,5334.57 6823.42,5436.57 7031.42,5436.57
OUT_Row6 on Bottom Layer "Top Layer-No Net" (solid, pour order 1000): 7360.49,5334.57 7358.49,5334.57 7256.49,5436.57 7464.49,5436.57
OUT_Row6 on Bottom Layer "Top Layer-No Net" (solid, pour order 1000): 7793.56,5334.57 7791.56,5334.57 7689.56,5436.57 7897.56,5436.57
OUT_Row6 on Bottom Layer "Top Layer-No Net" (solid, pour order 1000): 8226.63,5334.57 8224.63,5334.57 8122.63,5436.57 8330.63,5436.57
OUT_Row6 on Bottom Layer "Top Layer-No Net" (solid, pour order 1000): 8659.7,5334.57 8657.7,5334.57 8555.7,5436.57 8763.7,5436.57
OUT_Row6 on Bottom Layer "Top Layer-No Net" (solid, pour order 1000): 9092.77,5334.57 9090.77,5334.57 8988.77,5436.57 9196.77,5436.57
OUT_Row6 on Bottom Layer "Top Layer-No Net" (solid, pour order 1000): 9525.84,5334.57 9523.84,5334.57 9421.84,5436.57 9629.84,5436.57
OUT_Row6 on Bottom Layer "Top Layer-No Net" (solid, pour order 1000): 9958.92,5334.57 9956.92,5334.57 9854.92,5436.57 10062.92,5436.57
OUT_Row6 on Bottom Layer "Top Layer-No Net" (solid, pour order 1000): 10391.99,5334.57 10389.99,5334.57 10287.99,5436.57 10495.99,5436.57
OUT_Row6 on Bottom Layer "Top Layer-No Net" (solid, pour order 1000): 10825.06,5334.57 10823.06,5334.57 10721.06,5436.57 10929.06,5436.57
OUT_Row6 on Bottom Layer "Top Layer-No Net" (solid, pour order 1000): 11258.13,5334.57 11256.13,5334.57 11154.13,5436.57 11362.13,5436.57
OUT_Row6 on Bottom Layer "Top Layer-No Net" (solid, pour order 1000): 11691.2,5334.57 11689.2,5334.57 11587.2,5436.57 11795.2,5436.57
OUT_Row6 on Bottom Layer "Top Layer-No Net" (solid, pour order 1000): 12124.27,5334.57 12122.27,5334.57 12020.27,5436.57 12228.27,5436.57
OUT_Row6 on Bottom Layer "Top Layer-No Net" (solid, pour order 1000): 12557.34,5334.57 12555.34,5334.57 12453.34,5436.57 12661.34,5436.57
OUT_Row6 on Bottom Layer "Top Layer-No Net" (solid, pour order 1000): 12990.41,5334.57 12988.41,5334.57 12886.41,5436.57 13094.41,5436.57
OUT_Row6 on Bottom Layer "Top Layer-No Net" (solid, pour order 1000): 13423.48,5334.57 13421.48,5334.57 13319.48,5436.57 13527.48,5436.57
OUT_Row6 on Bottom Layer "Top Layer-No Net" (solid, pour order 1000): 13856.55,5334.57 13854.55,5334.57 13752.55,5436.57 13960.55,5436.57
OUT_Row6 on Bottom Layer "Top Layer-No Net" (solid, pour order 1000): 14289.62,5334.57 14287.62,5334.57 14185.62,5436.57 14393.62,5436.57
OUT_Row7 on Bottom Layer "Top Layer-No Net" (solid, pour order 1000): 5195.14,5925.12 5193.14,5925.12 5091.14,6027.12 5299.14,6027.12
OUT_Row7 on Bottom Layer "Top Layer-No Net" (solid, pour order 1000): 5628.21,5925.12 5626.21,5925.12 5524.21,6027.12 5732.21,6027.12
OUT_Row7 on Bottom Layer "Top Layer-No Net" (solid, pour order 1000): 6061.28,5925.12 6059.28,5925.12 5957.28,6027.12 6165.28,6027.12
OUT_Row7 on Bottom Layer "Top Layer-No Net" (solid, pour order 1000): 6494.35,5925.12 6492.35,5925.12 6390.35,6027.12 6598.35,6027.12
OUT_Row7 on Bottom Layer "Top Layer-No Net" (solid, pour order 1000): 6927.42,5925.12 6925.42,5925.12 6823.42,6027.12 7031.42,6027.12
OUT_Row7 on Bottom Layer "Top Layer-No Net" (solid, pour order 1000): 7360.49,5925.12 7358.49,5925.12 7256.49,6027.12 7464.49,6027.12
OUT_Row7 on Bottom Layer "Top Layer-No Net" (solid, pour order 1000): 7793.56,5925.12 7791.56,5925.12 7689.56,6027.12 7897.56,6027.12
OUT_Row7 on Bottom Layer "Top Layer-No Net" (solid, pour order 1000): 8226.63,5925.12 8224.63,5925.12 8122.63,6027.12 8330.63,6027.12
OUT_Row7 on Bottom Layer "Top Layer-No Net" (solid, pour order 1000): 8659.7,5925.12 8657.7,5925.12 8555.7,6027.12 8763.7,6027.12
OUT_Row7 on Bottom Layer "Top Layer-No Net" (solid, pour order 1000): 9092.77,5925.12 9090.77,5925.12 8988.77,6027.12 9196.77,6027.12
OUT_Row7 on Bottom Layer "Top Layer-No Net" (solid, pour order 1000): 9525.84,5925.12 9523.84,5925.12 9421.84,6027.12 9629.84,6027.12
OUT_Row7 on Bottom Layer "Top Layer-No Net" (solid, pour order 1000): 9958.92,5925.12 9956.92,5925.12 9854.92,6027.12 10062.92,6027.12
OUT_Row7 on Bottom Layer "Top Layer-No Net" (solid, pour order 1000): 10391.99,5925.12 10389.99,5925.12 10287.99,6027.12 10495.99,6027.12
OUT_Row7 on Bottom Layer "Top Layer-No Net" (solid, pour order 1000): 10825.06,5925.12 10823.06,5925.12 10721.06,6027.12 10929.06,6027.12
OUT_Row7 on Bottom Layer "Top Layer-No Net" (solid, pour order 1000): 11258.13,5925.12 11256.13,5925.12 11154.13,6027.12 11362.13,6027.12
OUT_Row7 on Bottom Layer "Top Layer-No Net" (solid, pour order 1000): 11691.2,5925.12 11689.2,5925.12 11587.2,6027.12 11795.2,6027.12
OUT_Row7 on Bottom Layer "Top Layer-No Net" (solid, pour order 1000): 12124.27,5925.12 12122.27,5925.12 12020.27,6027.12 12228.27,6027.12
OUT_Row7 on Bottom Layer "Top Layer-No Net" (solid, pour order 1000): 12557.34,5925.12 12555.34,5925.12 12453.34,6027.12 12661.34,6027.12
OUT_Row7 on Bottom Layer "Top Layer-No Net" (solid, pour order 1000): 12990.41,5925.12 12988.41,5925.12 12886.41,6027.12 13094.41,6027.12
OUT_Row7 on Bottom Layer "Top Layer-No Net" (solid, pour order 1000): 13423.48,5925.12 13421.48,5925.12 13319.48,6027.12 13527.48,6027.12
OUT_Row7 on Bottom Layer "Top Layer-No Net" (solid, pour order 1000): 13856.55,5925.12 13854.55,5925.12 13752.55,6027.12 13960.55,6027.12
OUT_Row7 on Bottom Layer "Top Layer-No Net" (solid, pour order 1000): 14289.62,5925.12 14287.62,5925.12 14185.62,6027.12 14393.62,6027.12
VCC on Bottom Layer "Top Layer-No Net" (solid, pour order 1018): 11764.43,2081 11789.43,2106 11789.43,2156 11764.43,2181 11614.43,2181 11589.43,2156 11589.43,2106 11614.43,2081
VCC on Bottom Layer "Top Layer-No Net" (solid, pour order 1018): 8299.87,2081 8324.87,2106 8324.87,2156 8299.87,2181 8149.87,2181 8124.87,2156 8124.87,2106 8149.87,2081
OUT_Row7 on Bottom Layer "Top Layer-No Net" (solid, pour order 1018): 13930.1,5953.73 13955.1,5978.73 13955.1,6028.73 13930.1,6053.73 13780.1,6053.73 13755.1,6028.73 13755.1,5978.73 13780.1,5953.73
OUT_Row6 on Bottom Layer "Top Layer-No Net" (solid, pour order 1018): 12630.89,5363.17 12655.89,5388.17 12655.89,5438.17 12630.89,5463.17 12480.89,5463.17 12455.89,5438.17 12455.89,5388.17 12480.89,5363.17
OUT_Row5 on Bottom Layer "Top Layer-No Net" (solid, pour order 1018): 11331.68,4772.62 11356.68,4797.62 11356.68,4847.62 11331.68,4872.62 11181.68,4872.62 11156.68,4847.62 11156.68,4797.62 11181.68,4772.62
OUT_Row4 on Bottom Layer "Top Layer-No Net" (solid, pour order 1018): 10032.46,4182.07 10057.46,4207.07 10057.46,4257.07 10032.46,4282.07 9882.46,4282.07 9857.46,4257.07 9857.46,4207.07 9882.46,4182.07
OUT_Row3 on Bottom Layer "Top Layer-No Net" (solid, pour order 1018): 8733.25,3591.52 8758.25,3616.52 8758.25,3666.52 8733.25,3691.52 8583.25,3691.52 8558.25,3666.52 8558.25,3616.52 8583.25,3591.52
OUT_Row2 on Bottom Layer "Top Layer-No Net" (solid, pour order 1018): 7434.04,3000.97 7459.04,3025.97 7459.04,3075.97 7434.04,3100.97 7284.04,3100.97 7259.04,3075.97 7259.04,3025.97 7284.04,3000.97
OUT_Row1 on Bottom Layer "Top Layer-No Net" (solid, pour order 1018): 6134.83,2410.42 6159.83,2435.42 6159.83,2485.42 6134.83,2510.42 5984.83,2510.42 5959.83,2485.42 5959.83,2435.42 5984.83,2410.42
GND on Bottom Layer "Top Layer-No Net" (solid, pour order 1001): 17890,7840 17890,730 4340,730 4340,7840

## Keep-outs
Keep-Out Layer:
  lines w10: 4340,730 4340,7840 17891,7840 17891,730 4340,730

## Silkscreen, mask and mechanical layers (free items; w line width, h text height)
Top Overlay:
  lines w10: 15515.71,3312.05 15580.71,3312.05 ; 15515.71,3707.05 15580.71,3707.05 ; 15535.71,3282.05 15535.71,3347.05 ; 15535.71,3377.05 15535.71,3442.05 ; 15535.71,3472.05 15535.71,3537.05 ; 15535.71,3562.05 15535.71,3627.05 ; 15535.71,3657.05 15535.71,3722.05 ; 15545.71,5947.05 15610.71,5947.05 ; 15550.71,5477.05 15615.71,5477.05 ; 15570.71,5447.05 15570.71,5512.05 ; 15570.71,5542.05 15570.71,5607.05 ; 15570.71,5637.05 15570.71,5702.05 ; 15570.71,5727.05 15570.71,5792.05 ; 15570.71,5822.05 15570.71,5887.05 ; 15570.71,5912.05 15570.71,5977.05 ; 15603.74,3769.01 15603.74,4044.01 15806.03,4044.01 15806.03,3769.01 ; 15605.71,3312.05 15670.71,3312.05 ; 15605.71,3707.05 15670.71,3707.05 ; 15630.71,5947.05 15695.71,5947.05 ; 15640.71,5477.05 15705.71,5477.05 ; 15700.71,3312.05 15765.71,3312.05 ; 15700.71,3707.05 15765.71,3707.05 ; 15725.71,5947.05 15790.71,5947.05 ; 15735.71,5477.05 15800.71,5477.05 ; 15795.71,3312.05 15860.71,3312.05 ; 15795.71,3707.05 15860.71,3707.05 ; 15820.71,5947.05 15885.71,5947.05 ; 15825.71,3282.05 15825.71,3347.05 ; 15825.71,3377.05 15825.71,3442.05 ; 15825.71,3472.05 15825.71,3537.05 ; 15825.71,3562.05 15825.71,3627.05 ; 15825.71,3657.05 15825.71,3722.05 ; 15830.71,5477.05 15895.71,5477.05 ; 15860.71,5447.05 15860.71,5512.05 ; 15860.71,5542.05 15860.71,5607.05 ; 15860.71,5637.05 15860.71,5702.05 ; 15860.71,5727.05 15860.71,5792.05 ; 15860.71,5822.05 15860.71,5887.05 ; 15860.71,5912.05 15860.71,5977.05 ; 16002.03,3769.01 16002.03,4044.01 16193.74,4044.01 16193.74,3769.01 ; 16710.71,2312.05 16710.71,2147.05 17010.71,2147.05 17010.71,2312.05 ; 16710.71,2537.05 16710.71,2702.05 17010.71,2702.05 17010.71,2537.05 ; 16810.71,2147.05 16810.71,2312.05 ; 16815.71,2537.05 16815.71,2702.05 ; 16905.71,2147.05 16905.71,2312.05 ; 16910.71,2537.05 16910.71,2702.05
  text "GND" at 15600.71,5872.05 h60
  text "+5.0V" at 15715.71,5872.05 h60
  text "485 DI" at 16025.03,3785.97 h60
  text "485 RO" at 15618.74,3784.01 h60
  text "Keep Alive" at 15570.71,3637.05 h60 r270
  text "VTG" at 16775.71,2572.53 h60 r90
  text "GND" at 16972.71,2569.02 h60 r90
  text "MOSI" at 16874.21,2553.05 h60 r90
  text "MISO" at 16775.71,2184.05 h60 r90
  text "SCK" at 16874.21,2184.05 h60 r90
  text "RST" at 16972.71,2184.05 h60 r90
  text "ISP6PIN" at 16723.71,2095.05 h60
  text "BANCO AZTECA" at 16027,1740 h120
  text "BOARD:" at 16027,1635 h120
  text "BAZ-DOTMATRIX-01R03" at 16428,1631 h120
Mechanical 13:
  lines w10: 4150,1850 14910,1850 15310,2250 15310,7840 ; 8748.82,4033.86 12104.96,4033.86 ; 9625.15,4033.86 9958.22,4033.86 ; 9792.13,3443.31 9792.13,4821.26 ; 9792.13,3814.17 9792.13,4399.45 ; 4477.17,2163.78 4477.17,5903.94 15102.4,5903.94 15102.4,2163.78 4477.17,2163.78

## Dimensions
12444.92,7695.28 to 12620.87,7990.16 on Mechanical 13
12180,1150 to 11785.91,1348.58 on Mechanical 13
12444.92,884.25 to 12886.22,627.95 on Mechanical 13
4340,7840 to 17891,7840 on Mechanical 13
4340,7840 to 4340,730 on Mechanical 13

## Text inside footprints (layer, text, board x,y; h text height)
C10: Top Overlay "+" at 16515.71,6372.05 h98.43 r270
C11: Top Overlay "+" at 15715.71,6372.05 h98.43 r270
D13: Top Overlay "~" at 16670.71,5607.05 h60 r90; Top Overlay "~" at 16775.71,5607.05 h60 r90; Top Overlay "+" at 16670.71,5707.05 h60 r90; Top Overlay "-" at 16780.71,5712.05 h60 r90
P1: Top Overlay "6" at 17020.71,2455.51 h50; Top Overlay "5" at 17020.71,2355.51 h50; Top Overlay "2" at 16678,2464 h50; Top Overlay "1" at 16680.71,2355.51 h50